# Altium PCB PMP.PcbDoc (part 1 of 2)
Units mil, origin at the board's own origin, x right, y up, seen from the top; angles counter-clockwise.
Board outline 5476.1 x 4612.44 mil, 2 copper layers (Top Layer, Bottom Layer); 198 components, 133 nets, 635 pads, 71 vias.
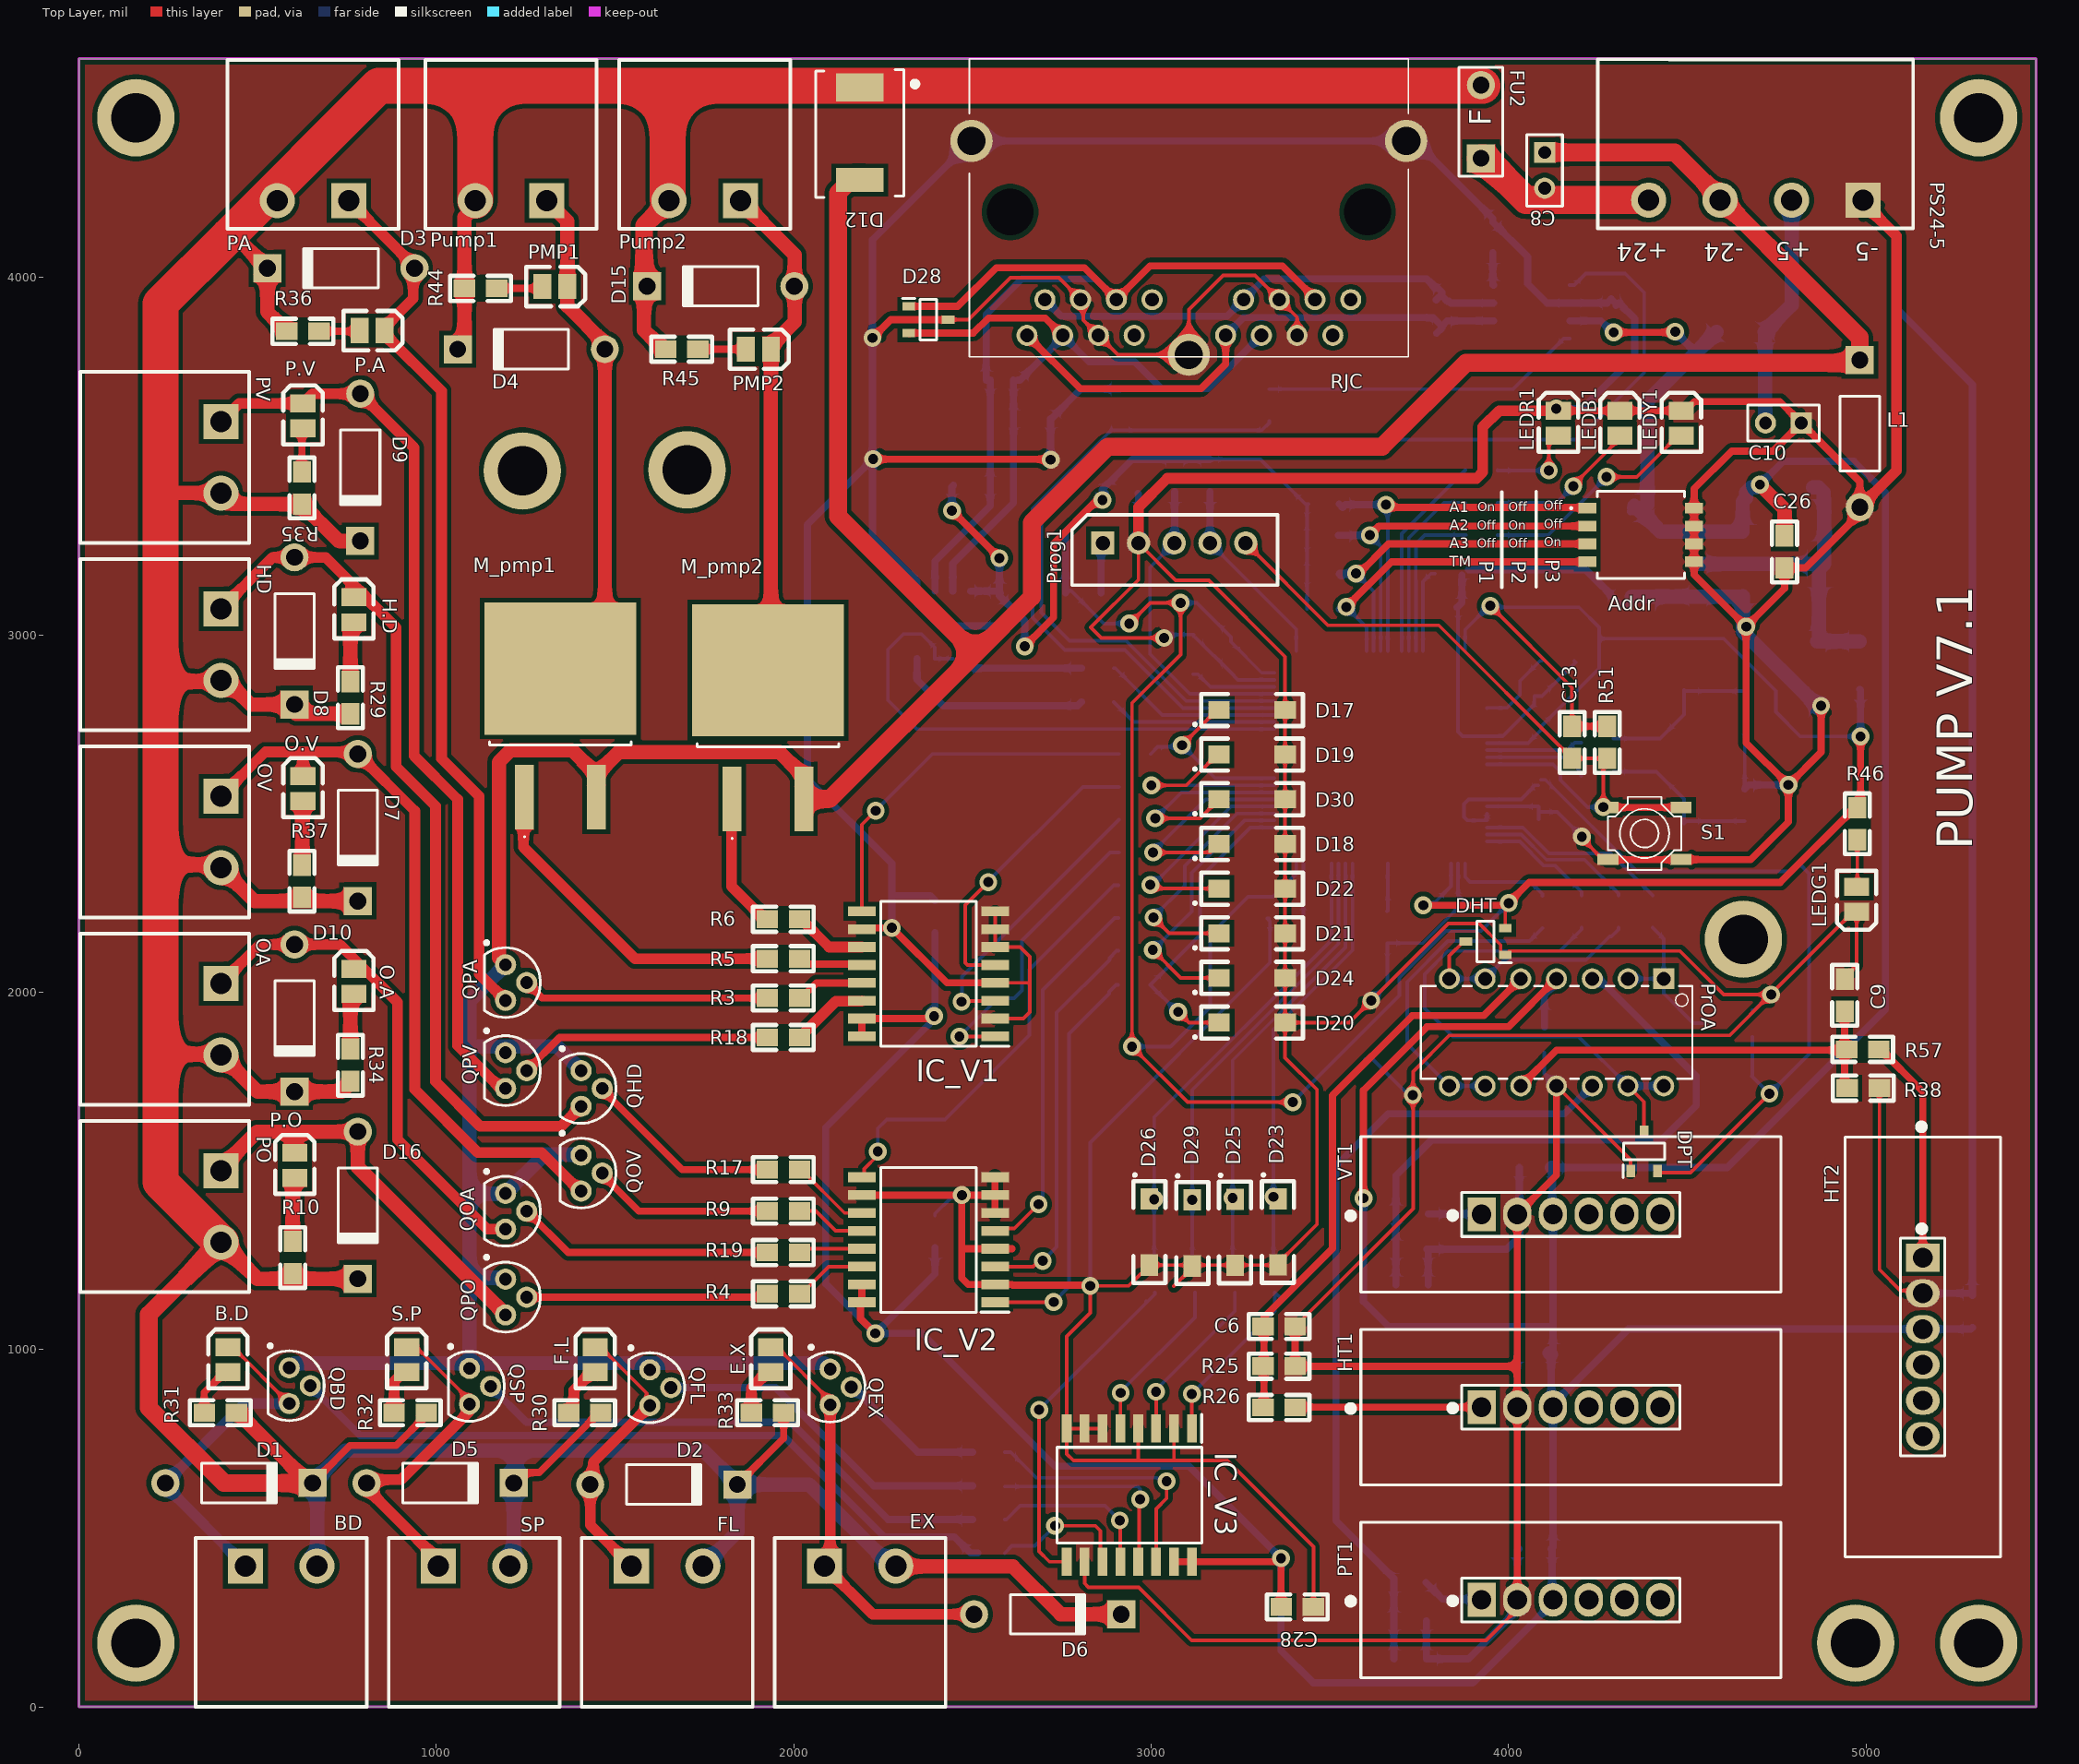
[diagram p0: Top Layer view]
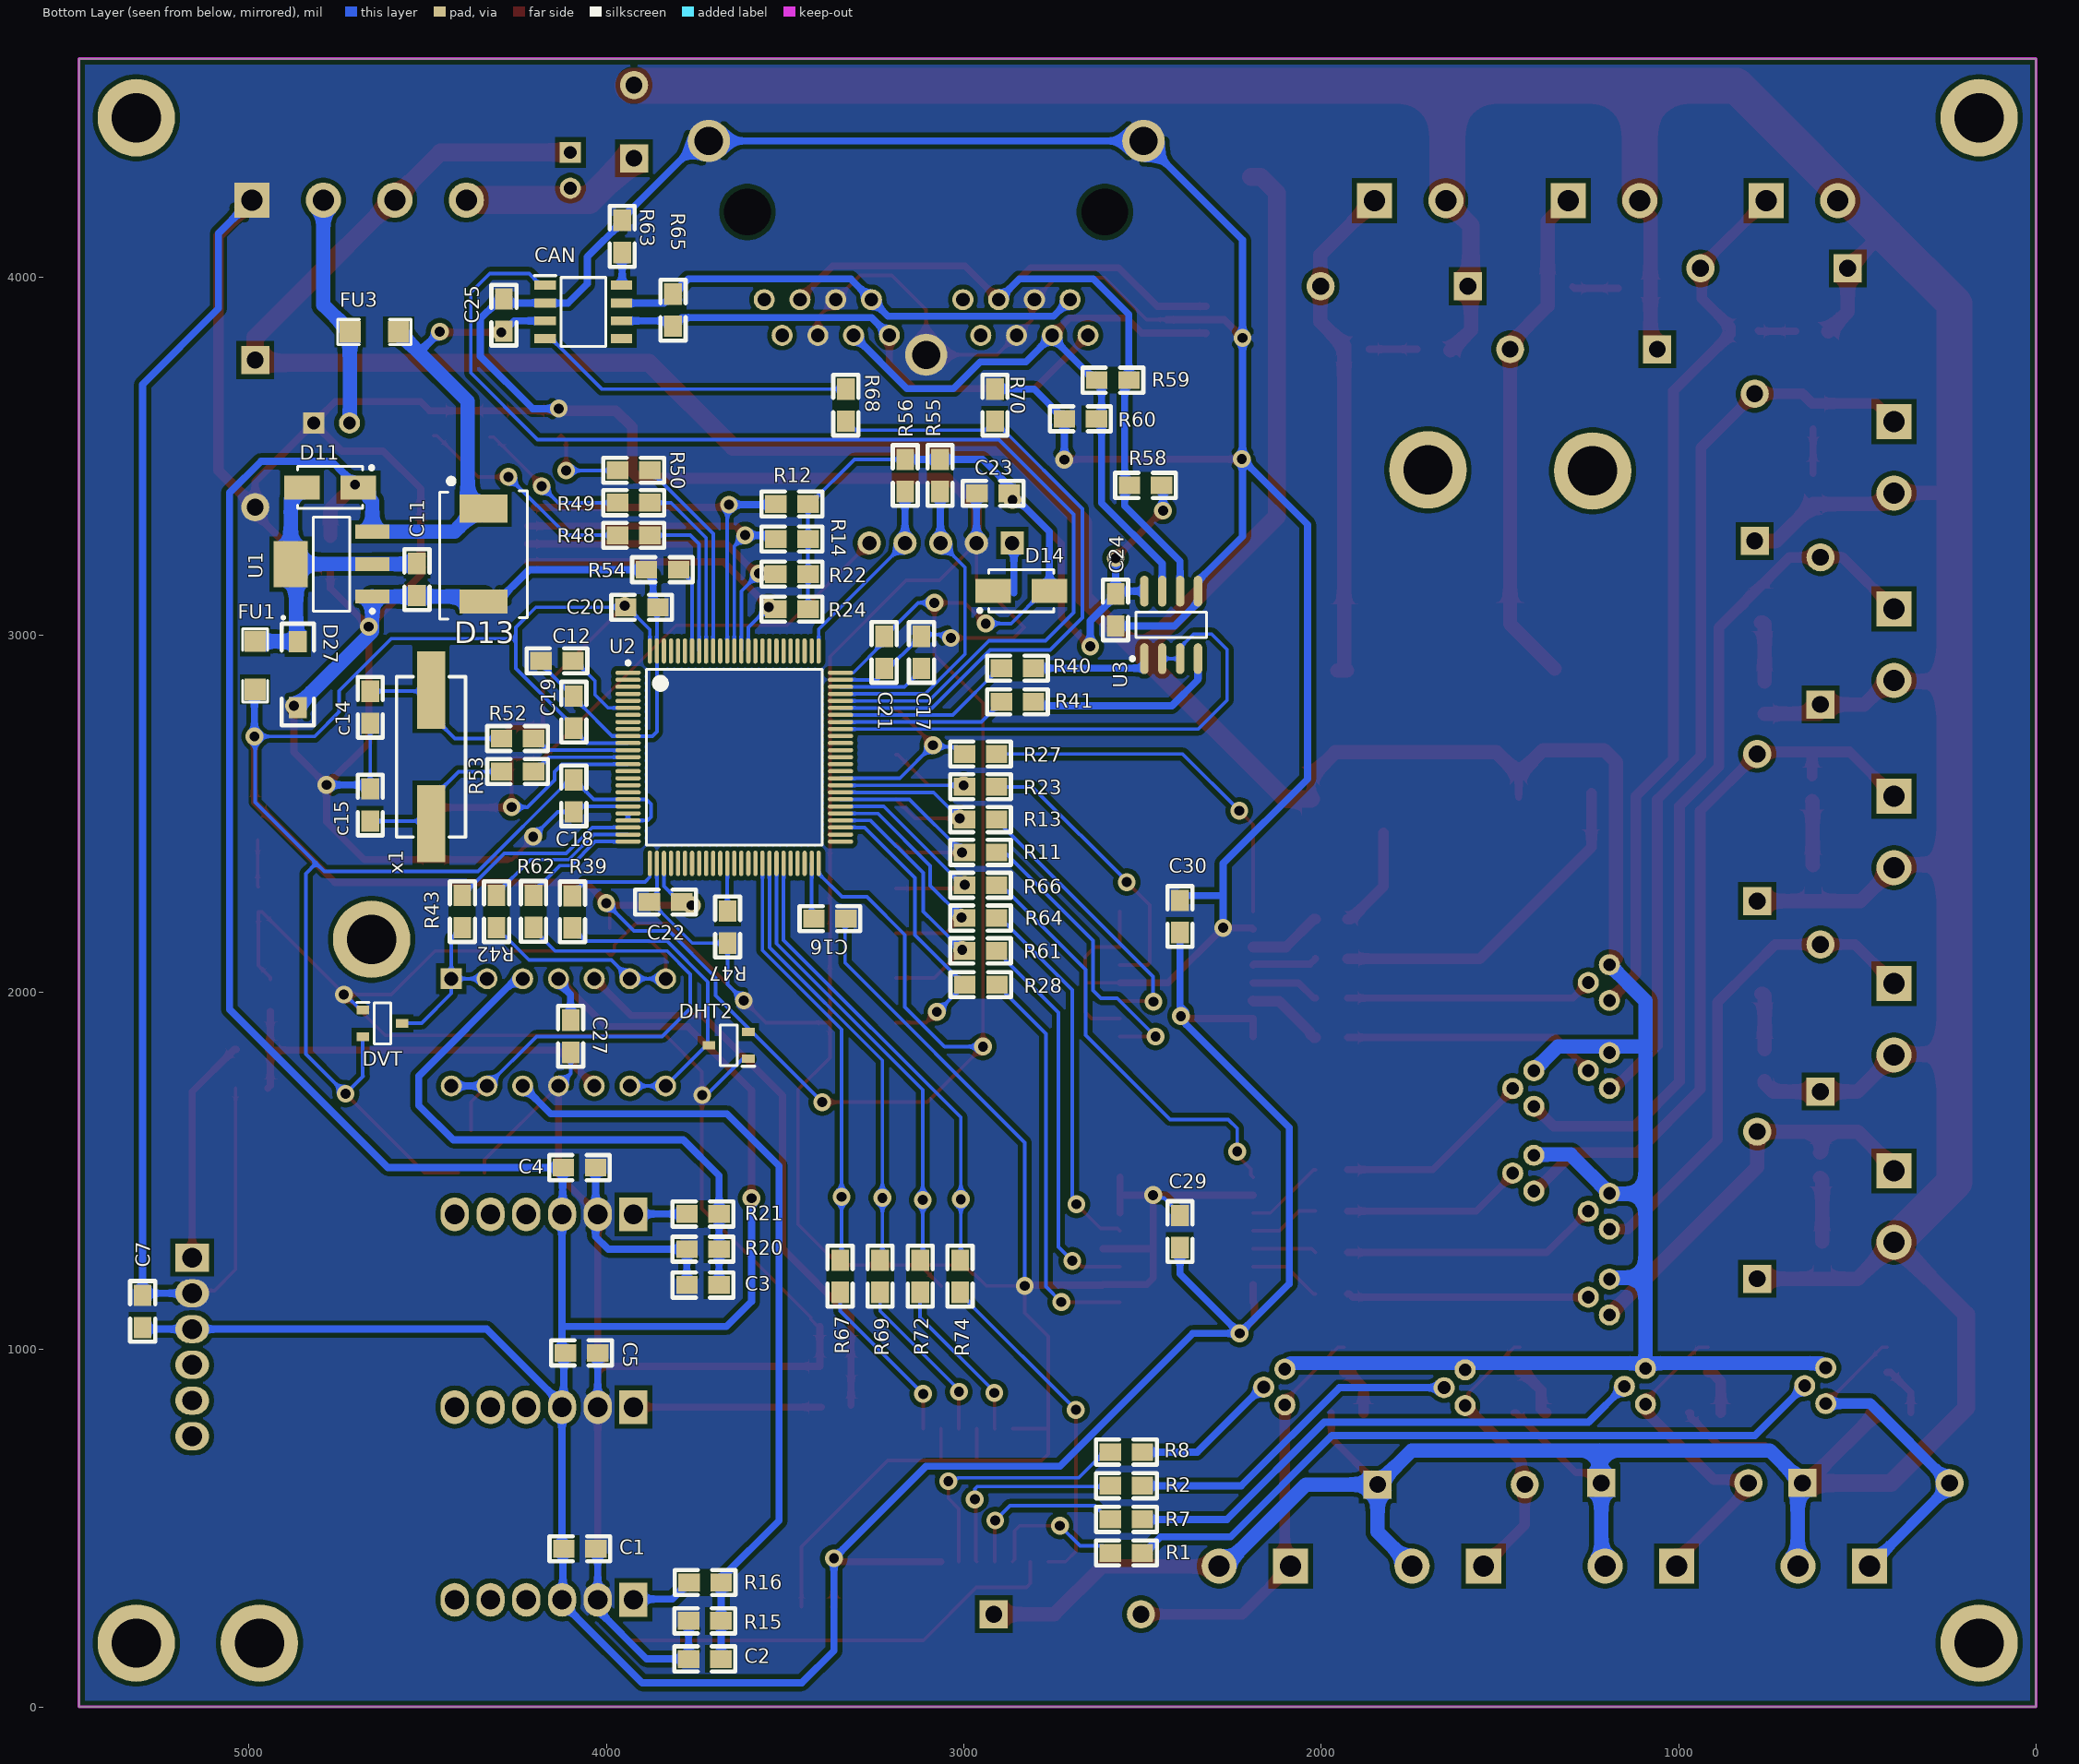
[diagram p1: Bottom Layer view, seen from below]

## Layer stack, top to bottom
Top Solder: solder mask 0.4, Solder Resist, Dk 3.5
Top Layer: signal copper 1.4
Dielectric 1: dielectric 12.6, FR-4, Dk 4.8
Bottom Layer: signal copper 1.4
Bottom Solder: solder mask 0.4, Solder Resist, Dk 3.5

## Board outline
0,0 0,4612.44 5476.1,4612.44 5476.1,0

## Design rules (kind name [scope] priority, off if disabled: settings)
AssemblyTestPointUsage [All] p1 off:
AssemblyTestpoint [All] p1 off: testpointundercomponent=TRUE minsize=40 maxsize=100 preferedsize=60 minholesize=0 maxholesize=40 preferedholesize=32 testpointgrid=1 usegrid=TRUE gridtolerance=0.01 allowsidetop=TRUE allowsidebottom=TRUE
Clearance Clearance_1 [All vs InPolygon] p1: gap=13 ignorepadtopadclearanceinfootprint=FALSE except(0: Arc-Hole Track-Hole SMDPad-Hole THPad-Hole Via-Hole Fill-Hole Poly-Hole Region-Hole Text-Hole)
Clearance [All] p2: gap=7 ignorepadtopadclearanceinfootprint=FALSE except(0: Arc-Hole Track-Hole SMDPad-Hole THPad-Hole Via-Hole Fill-Hole Poly-Hole Region-Hole Text-Hole)
ComponentClearance [All] p1 off: gap=10 collisioncheckmode=3 verticalgap=10 showdistances=FALSE
FabricationTestPointUsage [All] p1 off: valid=0 allowmultiple=FALSE
FabricationTestpoint [All] p1 off: side=3 testpointundercomponent=TRUE minsize=40 maxsize=100 preferedsize=60 minholesize=0 maxholesize=40 preferedholesize=32 testpointgrid=1 allowsidetop=TRUE allowsidebottom=TRUE usegrid=TRUE gridtolerance=0.01
Height [All] p1 off: minheight=0 maxheight=3937.01 prefheight=500
HoleSize [All] p1 off: absolutevalues=TRUE maxlimit=100 minlimit=1 maxpercent=80.000 minpercent=20.000
HoleToHoleClearance [All] p1 off: gap=10 allowstackedmicrovias=TRUE
LayerPairs [All] p1 off: enforce=TRUE
MinimumSolderMaskSliver [All] p1 off: minsoldermaskwidth=10
NetAntennae [All] p1 off: netantennaetolerance=0
PasteMaskExpansion [All] p1 off: expansion=0
PlaneConnect [All] p1: planeconnectstyle=Direct reliefexpansion=20 reliefentries=4 reliefconductorwidth=10 reliefairgap=10
PolygonConnect [All] p1: connectstyle=Direct reliefconductorwidth=10 reliefentries=4 polygonreliefangle="90 Angle" airgapwidth=10
RoutingVias [All] p1: holewidth=15.75 width=31.5 viastyle="Through Hole" minholewidth=11.81 minwidth=23.62 maxholewidth=28 maxwidth=50
SilkToSilkClearance [All] p1 off: silktosilkclearance=10
SilkToSolderMaskClearance [IsPad] p1 off: minsilkscreentomaskgap=10 clearancetoexposedcopper=TRUE
SolderMaskExpansion [All] p1 off: expansion=4 istentingtop=FALSE
Width [All] p1: maxlimit=200 minlimit=10 preferedwidth=10 minimp=50.000000 maximp=50.000000 favimp=50.000000
15 further rules are at their usual default settings.

## Classes and differential pairs
component class "CAN bus": C25 CAN R63 R65 R68 R70 RJC
component class gatedriver: B.D C28 C29 C30 D17 D18 D19 D20 D21 D22 D23 D24 D25 D26 D29 D30 E.X F.L H.D IC_V1 IC_V2 IC_V3 O.A O.V P.A P.O P.V PMP1 PMP2 R10 R11 R13 R23 R27 R28 R29 R30 R31 R32 R33 R34 R35 R36 R37 R44 R45 R61 R64 R66 R67 R69 R72 R74 S.P
component class Power: C8 C10 C11 C26 D11 D12 D13 D27 FU1 FU2 FU3 L1 LEDG1 PS24-5 R46 U1
component class microf4: C12 C13 c14 c15 C16 C17 C18 C19 C20 C21 C22 C23 C24 D14 D28 LEDB1 LEDR1 LEDY1 Prog1 R40 R41 R47 R48 R49 R50 R51 R52 R53 R54 R55 R56 R58 R59 R60 S1 U2 U3 x1
component class accessories: Addr BD C1 C2 C3 C4 C5 C6 C7 C9 C27 D1 D2 D3 D4 D5 D6 D7 D8 D9 D10 D15 D16 DHT DHT2 DPT DVT EX FL HD HT1 HT2 M_pmp1 M_pmp2 OA OV PA PO PrOA PT1 Pump1 Pump2 PV QBD QEX QFL QHD QOA QOV QPA QPO QPV QSP R1 R2 R3 R4 R5 R6 R7 R8 R9 R12 R14 R15 R16 R17 R18 R19 R20 R21 R22 R24 R25 R26 R38 R39 R42 R43 R57 R62 SP VT1

## Components (designator, comment, footprint, x,y, rotation, side; value= is the part's Value field where it differs from the comment)
Addr "GDH04STR04" GDH04STR04 4370,3279.57 r270 top
B.D "Red LED" 3518 417.05,971.26 r90 top
BD "Header 2" PHOENIX2-RIGHT 566.06,393.94 r270 top
C1 "100nF" 0805 4074.53,442.17 r180 bottom
C2 "100nF" 0805 3725.12,134.09 r0 bottom
C3 "100nF" 0805 3730.04,1180.35 r0 bottom
C4 "100nF" 0805 4075.51,1509.09 r180 bottom
C5 "100nF" 0805 4069.61,990.39 r180 bottom
C6 "100nF" 0805 3357.99,1064.21 r0 top
C7 "100nF" 0805 5297.95,1106.54 r90 bottom
C8 "100uf" HDR1X2 4101.1,4350.24 r270 top
C9 "100nF" 0805 4940.67,1991.38 r90 top
C10 "100uf" HDR1X2 4819.21,3592.76 r180 top
C11 "10uF" 0805 4530.24,3154.76 r270 bottom
C12 "100nF" 0805 4138.5,2927.4 r180 bottom
C13 "" 0805 4177.87,2699.06 r270 top value=100nF
c14 "22pf" 0805 4661.14,2797.48 r270 bottom
c15 "22pf" 0805 4661.14,2523.86 r90 bottom
C16 "2.2uF" 0805 3374.72,2205.94 r180 bottom
C17 "2.2uF" 0805 3118.82,2951.02 r90 bottom
C18 "100nF" 0805 4091.26,2549.45 r90 bottom
C19 "100nF" 0805 4091.26,2783.7 r270 bottom
C20 "100nF" 0805 3901.3,3077.01 r0 bottom
C21 "100nF" 0805 3223.15,2951.02 r90 bottom
C22 "100nF" 0805 3834.65,2252.2 r180 bottom
C23 "100nF" 0805 2918.03,3395.91 r180 bottom
C24 "100nF" 0805 2575.51,3069.84 r90 bottom
C25 "100nf" 0805 4287.13,3894.92 r270 bottom value=100nF
C26 "10uF" 0805 4772.36,3232.24 r270 top
C27 "100nF" 0805 4100.12,1876.5 r90 bottom
C28 "100nF" 0805 3409.17,279.76 r180 top
C29 "100nF" 0805 2395.39,1329.96 r270 bottom
C30 "100nF" 0805 2395.39,2211.85 r270 bottom
CAN "MCP2551-E_SN" SOIC127P600X175-8N 4064.68,3903.78 r180 bottom
D1 "Diode 1N4007" DO-41 447.56,626.22 r0 top
D2 "Diode 1N4007" DO-41 1636.34,622.28 r0 top
D3 "Diode 1N4007" DO-41 732.99,4025.83 r180 top
D4 "Diode 1N4007" DO-41 1265.67,3799.45 r180 top
D5 "Diode 1N4007" DO-41 1010.55,626.22 r0 top
D6 "Diode 1N4007" DO-41 2710.35,259.09 r0 top
D7 "Diode 1N4007" DO-41 780.24,2460.87 r270 top
D8 "Diode 1N4007" DO-41 603.07,3011.06 r270 top
D9 "Diode 1N4007" DO-41 787.13,3468.74 r270 top
D10 "Diode 1N4007" DO-41 603.07,1927.6 r270 top
D11 "US1M" US1M 4773.35,3412.64 r180 bottom
D12 "SS34LWHRVG" SS34 2182.8,4400.83 r90 top
D13 "SS34LWHRVG" SS34 4346.18,3221.69 r90 bottom
D14 "US1M" US1M 2839.29,3123.27 r0 bottom
D15 "Diode 1N4007" DO-41 1795.98,3975.63 r180 top
D16 "Diode 1N4007" DO-41 780.24,1403.78 r270 top
D17 "Diode Zener" D1805 3284.17,2792.56 r180 top
D18 "Diode Zener" D1805 3284.17,2417.56 r180 top
D19 "Diode Zener" D1805 3284.17,2667.56 r180 top
D20 "Diode Zener" D1805 3284.17,1917.56 r180 top
D21 "Diode Zener" D1805 3284.17,2167.56 r180 top
D22 "Diode Zener" D1805 3284.17,2292.56 r180 top
D23 "Diode Zener" D1805 3357.72,1327.24 r90 top
D24 "Diode Zener" D1805 3284.17,2042.56 r180 top
D25 "Diode Zener" D1805 3237.73,1326.02 r90 top
D26 "Diode Zener" D1805 2997.76,1327.01 r90 top
D27 "Diode Zener" D1805 4860.94,2887.05 r90 bottom
D28 "PSM712-12" PSM712 2433.78,3883.11 r0 top
D29 "Diode Zener" D1805 3117.74,1324.29 r90 top
D30 "Diode Zener" D1805 3284.17,2542.56 r180 top
DHT "BAT54SWFILMY" psm712 3878.66,2140.98 r180 top
DHT2 "BAT54SWFILMY" psm712 3715.28,1850.63 r0 bottom
DPT "BAT54SWFILMY" psm712 4378.66,1611.46 r90 top
DVT "BAT54SWFILMY" psm712 4569.61,1913.62 r180 bottom
E.X "Red LED" 3518 1935.75,971.26 r90 top
EX "Header 2" PHOENIX2-RIGHT 2185.75,393.94 r270 top
F.L "Red LED" 3518 1444.61,971.26 r90 top
FL "Header 2" PHOENIX2-RIGHT 1645.85,393.94 r270 top
FU1 "Fuse Thermal" 1206 4982.99,2914.61 r270 bottom
FU2 "Fuse Thermal" "RESETABLE FUSE 3A" 3922.95,4332.91 r90 top
FU3 "Fuse Thermal" 1206 4649.33,3847.68 r180 bottom
H.D "Red LED" 3518 769.41,3070.12 r90 top
HD "Header 2" PHOENIX2-RIGHT 397.36,2972.48 r180 top
HT1 "mpx5010dp" MPX-DP 4174.53,838.82 r180 top
HT2 "NF" MPX-DP 5159.17,1007.13 r90 top
IC_V1 "TC4469COE" SOIC127P1034X264-16N 2376.97,2051.18 r180 top
IC_V2 "TC4469COE" SOIC127P1034X264-16N 2376.97,1307.09 r180 top
IC_V3 "TC4469COE" SOIC127P1034X264-16N 2938.98,592.52 r270 top
L1 "ferrit" FBEAD 4982.99,3563.23 r90 top value=10mH
LEDB1 "BLUE LED" 3518 4311.73,3592.32 r90 top
LEDG1 "power" 3518 4974.13,2259.65 r270 top
LEDR1 "Red LED" 3518 4139.49,3592.32 r90 top
LEDY1 "Yellow LED" 3518 4483.98,3592.32 r90 top
M_pmp1 "BTS133" IPB026N06NATMA1 1347.17,2772.87 r270 top
M_pmp2 "BTS133" IPB026N06NATMA1 1927.87,2767.95 r270 top
O.A "Red LED" 3518 769.41,2030.31 r90 top
O.V "Red LED" 3518 626.69,2569.69 r90 top
OA "Header 2" PHOENIX2-RIGHT 397.36,1924.06 r180 top
OV "Header 2" PHOENIX2-RIGHT 397.36,2448.27 r180 top
P.A "Red LED" 3518 820.04,3851.61 r0 top
P.O "Red LED" 3518 604.06,1515.55 r90 top
P.V "Red LED" 3518 626.69,3612.87 r90 top
PA "Header 2" PHOENIX2-RIGHT 654.84,4215.21 r90 top
PMP1 "BLUE LED" 3518 1331.61,3974.65 r0 top
PMP2 "BLUE LED" 3518 1901.3,3799.45 r0 top
PO "Header 2" PHOENIX2-RIGHT 397.36,1399.84 r180 top
PrOA "LM324AN" DIP254P762X432-14 3834.37,1737.64 r270 top
Prog1 "Progrommer" "jp circular 5" 2864.68,3257.13 r0 top
PS24-5 "Header 4" PHOENIX4-RIGHT 4993.05,4215.77 r90 top
PT1 "mpx5100dp" MPX-DP 4174.53,299.45 r180 top
Pump1 "Header 2" PHOENIX2-RIGHT 1208.98,4215.21 r90 top
Pump2 "Header 2" PHOENIX2-RIGHT 1751.3,4215.21 r90 top
PV "Header 2" PHOENIX2-RIGHT 397.36,3496.69 r180 top
QBD "2N2222" 2N2222 588.31,898.66 r180 top
QEX "2N2222" 2N2222 2101.89,894.92 r180 top
QFL "2N2222" 2N2222 1597.36,893.15 r180 top
QHD "2N2222" 2N2222 1405.24,1730.55 r180 top
QOA "2N2222" 2N2222 1193.62,1386.99 r180 top
QOV "2N2222" 2N2222 1405.24,1493.6 r180 top
QPA "2N2222" 2N2222 1193.62,2026.81 r180 top
QPO "2N2222" 2N2222 1193.62,1146.69 r180 top
QPV "2N2222" 2N2222 1193.62,1780.55 r180 top
QSP "2N2222" 2N2222 1092.83,896.89 r180 top
R1 "1k" 0805 2545.28,430.35 r180 bottom
R2 "1k" 0805 2545.28,618.67 r180 bottom
R3 "1k" 0805 1971.18,1983.5 r180 top
R4 "1k" 0805 1971.18,1155.75 r180 top
R5 "100" 0805 1971.18,2093.74 r180 top
R6 "100" 0805 1971.18,2203.98 r180 top
R7 "1k" 0805 2545.28,524.51 r180 bottom
R8 "1k" 0805 2545.28,712.83 r180 bottom
R9 "1k" 0805 1971.18,1387.42 r180 top
R10 "4.7k" 0805 598.15,1257.4 r90 top
R11 "220" 0805 2953.46,2391.12 r180 bottom
R12 "10k" 0805 3481.02,3366.38 r180 bottom
R13 "220" 0805 2953.46,2482.94 r0 bottom
R14 "10k" 0805 3481.02,3268.28 r180 bottom
R15 "3.3k" 0805 3725.12,240.39 r180 bottom
R16 "1.8k" 0805 3724.13,347.68 r0 bottom
R17 "1k" 0805 1971.18,1503.26 r180 top
R18 "1k" 0805 1971.18,1873.27 r180 top
R19 "1k" 0805 1971.18,1271.58 r180 top
R20 "3.3k" 0805 3730.04,1280.75 r180 bottom
R21 "1.8k" 0805 3730.04,1379.17 r0 bottom
R22 "10k" 0805 3481.02,3170.18 r180 bottom
R23 "220" 0805 2953.46,2574.76 r0 bottom
R24 "10k" 0805 3481.02,3072.09 r180 bottom
R25 "3.3k" 0805 3357.99,952.99 r180 top
R26 "1.8k" 0805 3357.99,837.83 r0 top
R27 "220" 0805 2953.46,2666.57 r0 bottom
R28 "220" 0805 2952.48,2020.91 r180 bottom
R29 "4.7k" 0805 759.57,2824.06 r90 top
R30 "4.7k" 0805 1415.08,823.07 r180 top
R31 "4.7k" 0805 395.67,823.07 r180 top
R32 "4.7k" 0805 926.89,823.07 r180 top
R33 "4.7k" 0805 1926.61,823.07 r180 top
R34 "4.7k" 0805 759.57,1795.79 r90 top
R35 "4.7k" 0805 623.74,3410.94 r90 top
R36 "4.7k" 0805 626.69,3849.65 r0 top
R37 "4.7k" 0805 623.74,2310.55 r90 top
R38 "3.3k" 0805 4992.83,1731.54 r180 top
R39 "0" 0805 4095.2,2224.65 r90 bottom
R40 "10" 0805 2850.12,2906.73 r0 bottom
R41 "10" 0805 2850.12,2812.24 r0 bottom
R42 "0" 0805 4307.8,2225.63 r90 bottom
R43 "0" 0805 4403.27,2225.63 r270 bottom
R44 "4.7k" 0805 1123.66,3969.72 r0 top
R45 "4.7k" 0805 1686.73,3799.45 r0 top
R46 "330" 0805 4976.1,2471.42 r270 top
R47 "Res1" 0805 3661.14,2182.32 r270 bottom value=10k
R48 "220" 0805 3923.94,3278.78 r0 bottom
R49 "220" 0805 3923.94,3369.82 r0 bottom
R50 "220" 0805 3923.94,3460.87 r0 bottom
R51 "10k" 0805 4276.3,2699.06 r90 top
R52 "0" 0805 4248.74,2709.88 r0 bottom
R53 "220" 0805 4248.74,2617.36 r180 bottom
R54 "10k" 0805 3843.23,3182.32 r0 bottom
R55 "10k" 0805 3066.65,3446.1 r90 bottom
R56 "10k" 0805 3164.09,3446.1 r90 bottom
R57 "1.8k" 0805 4991.14,1839.8 r0 top
R58 "4.7K" 0805 2491.85,3418.54 r0 bottom
R59 "NF" 0805 2583.11,3712.83 r0 bottom
R60 "4.7K" 0805 2673.94,3604.57 r0 bottom
R61 "220" 0805 2953.46,2115.67 r0 bottom
R62 "0" 0805 4204.45,2225.91 r90 bottom
R63 "" 0805 3956.42,4115.12 r270 bottom value=10k
R64 "220" 0805 2953.46,2207.49 r0 bottom
R65 "" 0805 3813.7,3908.7 r270 bottom value=120
R66 "220" 0805 2953.46,2299.31 r0 bottom
R67 "220" 0805 3346.18,1204.96 r270 bottom
R68 "" 0805 3330.43,3642.95 r270 bottom value=1.8k
R69 "220" 0805 3234.3,1204.96 r90 bottom
R70 "" 0805 2913.11,3642.95 r90 bottom value=3.3k
R72 "220" 0805 3122.43,1204.96 r90 bottom
R74 "220" 0805 3010.55,1204.96 r90 bottom
RJC "RJ45-2x" RJ45_DUAL_RIGHT 3105.63,3783.9 r270 top
S1 "SW-PB" SW-PB-4P 4278.27,2516.97 r0 top
S.P "Red LED" 3518 917.05,971.26 r90 top
SP "Header 2" PHOENIX2-RIGHT 1105.96,393.94 r270 top
U1 "REG1117-3.3" SOT223 4769.41,3198.07 r0 bottom
U2 "STM32F40X_41X-SQ100" 100A_N 3642.44,2657.72 r180 bottom
U3 "MAX485CSA" NSO8_N 2420,3027.8 r90 bottom
VT1 "mpx5010dp" MPX-DP 4174.53,1378.19 r180 top
x1 "8MHz" HC49/4HSMX_1 4490.87,2658.7 r90 bottom

## Footprints (in the part's own frame and the unit in brackets; to place one, negate y for a bottom-side part, rotate by r counter-clockwise, add the part's x,y. Pads: shape width x height; smd on the part's side, far side on the other; paste and mask are expansions set on the pad)
2N2222 [mm] "TO, Flat Index; 3 In-Line, Axial Leads; Body Dia. 4.5mm; Leads 0.51 x 0.48 mm (max)"
  round 1.5 hole 0.9: 1(0,-1.27) 2(-1.5,0) 3(0,1.27)
  silkscreen extent -2.48,-2.95 1.5,2.48, body extent -2.48,-2.5 1.5,2.5, height 6.86
100A_N [mm] "Thin QFP, 100-Leads, Body 14x14mm, Pitch 0.5mm, IPC Medium Density"
  oval 1.8x0.3 smd: 1(-7.55,6) 2(-7.55,5.5) 3(-7.55,5) 4(-7.55,4.5) 5(-7.55,4) 6(-7.55,3.5) 7(-7.55,3) 8(-7.55,2.5) 9(-7.55,2) 10(-7.55,1.5) 11(-7.55,1) 12(-7.55,0.5) 13(-7.55,0) 14(-7.55,-0.5) 15(-7.55,-1) 16(-7.55,-1.5) 17(-7.55,-2) 18(-7.55,-2.5) 19(-7.55,-3) 20(-7.55,-3.5) 21(-7.55,-4) 22(-7.55,-4.5) 23(-7.55,-5) 24(-7.55,-5.5) 25(-7.55,-6) 51(7.55,-6) 52(7.55,-5.5) 53(7.55,-5) 54(7.55,-4.5) 55(7.55,-4) 56(7.55,-3.5) 57(7.55,-3) 58(7.55,-2.5) 59(7.55,-2) 60(7.55,-1.5) 61(7.55,-1) 62(7.55,-0.5) 63(7.55,0) 64(7.55,0.5) 65(7.55,1) 66(7.55,1.5) 67(7.55,2) 68(7.55,2.5) 69(7.55,3) 70(7.55,3.5) 71(7.55,4) 72(7.55,4.5) 73(7.55,5) 74(7.55,5.5) 75(7.55,6)
  oval 0.3x1.8 smd: 26(-6,-7.55) 27(-5.5,-7.55) 28(-5,-7.55) 29(-4.5,-7.55) 30(-4,-7.55) 31(-3.5,-7.55) 32(-3,-7.55) 33(-2.5,-7.55) 34(-2,-7.55) 35(-1.5,-7.55) 36(-1,-7.55) 37(-0.5,-7.55) 38(0,-7.55) 39(0.5,-7.55) 40(1,-7.55) 41(1.5,-7.55) 42(2,-7.55) 43(2.5,-7.55) 44(3,-7.55) 45(3.5,-7.55) 46(4,-7.55) 47(4.5,-7.55) 48(5,-7.55) 49(5.5,-7.55) 50(6,-7.55) 76(6,7.55) 77(5.5,7.55) 78(5,7.55) 79(4.5,7.55) 80(4,7.55) 81(3.5,7.55) 82(3,7.55) 83(2.5,7.55) 84(2,7.55) 85(1.5,7.55) 86(1,7.55) 87(0.5,7.55) 88(0,7.55) 89(-0.5,7.55) 90(-1,7.55) 91(-1.5,7.55) 92(-2,7.55) 93(-2.5,7.55) 94(-3,7.55) 95(-3.5,7.55) 96(-4,7.55) 97(-4.5,7.55) 98(-5,7.55) 99(-5.5,7.55) 100(-6,7.55)
  silkscreen extent -7.68,-6.25 6.25,6.82, body extent -7,-7 7,7, height 1.2
0805 [mil]
  rect 60x50 smd: 1(-45,0) 2(45,0)
  silkscreen extent -85,-35 85,35
1206 [mil]
  rect 60x60 smd: 1(-67.5,0) 2(67.5,0)
  silkscreen extent -102,-35 102,35
3518 [mil]
  rect 50x70 smd: 1(35,0) 2(-35,0)
  silkscreen extent -80,-55 85,55
D1805 [mil]
  rect 60x50 smd: 1(-90.75,2.68) 2(94.25,2.68)
  silkscreen extent -141,-42 165,48
DIP254P762X432-14 [mil]
  rect 58.5x58.5 hole 39: 1(-300,600)
  round 58.5 hole 39: 2(-300,500) 3(-300,400) 4(-300,300) 5(-300,200) 6(-300,100) 7(-300,0) 8(0,0) 9(0,100) 10(0,200) 11(0,300) 12(0,400) 13(0,500) 14(0,600)
  silkscreen extent -280,-80 -20,680
DO-41 [mm] "Diode, Axial; Body 5.2 x 2.7 mm (LxDia. max), Lead Dia. 0.86 mm (max)"
  round 2 hole 1.2: 1(-5.23,0)
  rect 2x2 hole 1.2: 2(5.23,0)
  silkscreen extent -2.65,-1.4 2.75,1.4
FBEAD [mm] "Diode, Axial; Body 5.2 x 2.7 mm (LxDia. max), Lead Dia. 0.86 mm (max)"
  round 2 hole 1.2: 1(-5.23,0)
  rect 2x2 hole 1.2: 2(5.23,0)
  silkscreen extent -2.65,-1.4 2.65,1.4
GDH04STR04 [mm]
  rect 0.76x1.27 smd: 1(-1.905,-3.795) 2(-0.635,-3.795) 3(0.635,-3.795) 4(1.905,-3.795) 5(1.905,3.795) 6(0.635,3.795) 7(-0.635,3.795) 8(-1.905,3.795)
  silkscreen extent -3.1,-5 3.1,3.1
HC49/4HSMX_1 [mm]
  rect 5.5x2 smd: 1(-4.75,0) 2(4.75,0)
  silkscreen extent -5.7,-2.45 5.7,2.45
HDR1X2 [mm] "Connector; Header; 2 Position"
  rect 1.5x1.5 hole 0.9: 1(0,0)
  round 1.5 hole 0.9: 2(2.54,0)
  silkscreen extent -1.27,-1.27 3.81,1.27
IPB026N06NATMA1 [mm]
  rect 4.6x1.35 smd: 1(5.775,-2.55) 3(5.775,2.55)
  rect 9.4x10.8 smd: 2(-3.375,0)
  silkscreen extent 1.83,-5.03 8.62,5.03
"jp circular 5" [mil]
  rect 65x65 hole 40: 1(0,0)
  round 65 hole 40: 2(100,0) 3(200,0) 4(300,0) 5(400,0)
  silkscreen extent -86,-118 490,79
MPX-DP [mm]
  rect 2x2.4 hole 1.4: 1(6.35,0)
  oval 2x2.4 hole 1.4: 2(3.81,0) 3(1.27,0) 4(-1.27,0) 5(-3.81,0) 6(-6.35,0)
  silkscreen extent -14.92,-5.53 15.85,5.53
NSO8_N [mm] "SOIC, 8-Leads, Body 4.9x3.9mm, Pitch 1.27mm, IPC Medium Density"
  oval 2.2x0.6 smd: 1(-2.4,1.905) 2(-2.4,0.635) 3(-2.4,-0.635) 4(-2.4,-1.905) 5(2.4,-1.905) 6(2.4,-0.635) 7(2.4,0.635) 8(2.4,1.905)
  silkscreen extent -2.52,-2.5 0.9,2.88, body extent -2,-2.5 2,2.5, height 1.75
PHOENIX2-RIGHT [mm]
  rect 2.5x2.5 hole 1.5: 1(0,-2.54)
  round 2.5 hole 1.5: 2(0,2.54)
  silkscreen extent -2,-6.08 10.01,6.08, body extent -1.98,-6.07 10.01,6.1, height 8.6
PHOENIX4-RIGHT [mm]
  rect 2.5x2.5 hole 1.5: 1(0.025,0.02)
  round 2.5 hole 1.5: 2(0.025,5.1) 3(0.025,10.18) 4(0.025,15.26)
  silkscreen extent -1.97,-3.54 10.03,18.87, body extent -1.96,-3.5 10.03,18.85, height 8.6
PSM712 [mm]
  rect 0.9x0.6 smd: 1(-2.85,0.925) 2(-2.85,-0.975) 3(-0.05,-0.025)
  silkscreen extent -3.3,-1.48 -0.85,1.47, body extent -2.85,-1.47 -0.05,1.43, height 1.3
psm712 [mm]
  rect 0.9x0.6 smd: 1(-2.85,0.925) 2(-2.85,-0.975) 3(-0.05,-0.025)
  silkscreen extent -3.3,-1.48 -0.85,1.47, body extent -2.85,-1.47 -0.05,1.43, height 1.3
"RESETABLE FUSE 3A" [mm]
  rect 2x2 hole 1.2: 1(0.02,0)
  round 2 hole 1.2: 2(5.225,0)
  silkscreen extent -1.25,-1.54 6.5,1.58
RJ45_DUAL_RIGHT [mm]
  round 1.493 hole 0.96: 1(-3.92,11.505) 2(-1.38,10.235) 3(-3.92,8.965) 4(-1.38,7.695) 5(-3.92,6.425) 6(-1.38,5.155) 7(-3.92,3.885) 8(-1.38,2.615) 9(-3.92,-2.615) 10(-1.38,-3.885) 11(-3.92,-5.155) 12(-1.38,-6.425) 13(-3.92,-7.695) 14(-1.38,-8.965) 15(-3.92,-10.235) 16(-1.38,-11.505)
  round 1.665 hole 3.33 unplated: P(-10.15,12.7) P(-10.15,-12.7)
  round 3.015 hole 2.01: SH(-15.2,15.45) SH(-15.2,-15.45)
  round 3 hole 2: SH(0,0)
  silkscreen extent -21.05,-15.6 0.15,15.6, body extent -21.05,-15.6 0.15,15.6, height 13.8
SOIC127P600X175-8N [mm]
  rect 1.525x0.65 smd: 1(-2.712,1.905) 2(-2.712,0.635) 3(-2.712,-0.635) 4(-2.712,-1.905) 5(2.712,-1.905) 6(2.712,-0.635) 7(2.712,0.635) 8(2.712,1.905)
  silkscreen extent -3.47,-2.45 1.6,2.58, body extent -3,-2.45 3,2.45, height 1.75
SOIC127P1034X264-16N [mm]
  rect 1.98x0.7 smd: 1(-4.735,4.445) 2(-4.735,3.175) 3(-4.735,1.905) 4(-4.735,0.635) 5(-4.735,-0.635) 6(-4.735,-1.905) 7(-4.735,-3.175) 8(-4.735,-4.445) 9(4.735,-4.445) 10(4.735,-3.175) 11(4.735,-1.905) 12(4.735,-0.635) 13(4.735,0.635) 14(4.735,1.905) 15(4.735,3.175) 16(4.735,4.445)
  silkscreen extent -5.72,-5.15 3.4,5.15, body extent -5.17,-5.15 5.17,5.15, height 2.64
SOT223 [mm] "SOT223, 4-Leads, Body 6.7x7.3mm (max), Pitch 2.30mm, IPC Medium Density"
  rect 2.4x1 smd: 1(-2.9,2.3) 2(-2.9,0) 3(-2.9,-2.3)
  rect 2.4x3.3 smd: 4(2.9,0)
  silkscreen extent -3.02,-3.35 1.3,3.47, body extent -1.85,-3.35 1.85,3.35, height 1.8
SS34 [mm] "Molded Diode, 2-Leads, Body 4.3x2.6mm, IPC Medium Density"
  rect 2x3.4 smd: 1(3.35,-0.05)
  rect 1.7x3.4 smd: 2(-3.25,-0.05)
  silkscreen extent -4.5,-4.1 4.6,3.08
SW-PB-4P [mm]
  rect 1.5x0.8 smd: 1(0,0) 1(5.2,0) 2(0,-3.7) 2(5.2,-3.7)
  silkscreen extent 0,-4.45 5.2,0.75, body extent 0,-4.45 5.22,0.75, height 2.2
US1M [mm] "Molded Diode, 2-Leads, Body 4.3x2.6mm, IPC Medium Density"
  rect 2.5x1.7 smd: 1(-2,0) 2(2,0)
  silkscreen extent -2.3,-1.5 3.07,1.52, body extent -2.3,-1.46 2.3,1.46, height 2.3

## Part data
Addr: "Switch", Manufacturer_Name="TE Connectivity", Mouser Part Number=506-GDH04STR04, Arrow Part Number=GDH04STR04, Arrow Price/Stock=https://www.arrow.com/en/products/gdh04str04/te-connectivity?region=nac, Datasheet Link=https://www.te.com/commerce/DocumentDelivery/DDEController?Action=showdoc&DocId=Customer+Drawing%7F1571983%7FC6%7Fpdf%7FEnglish%7FENG_CD_1571983_C6.pdf%7F1571983-5, Height=2.31mm, Manufacturer_Part_Number=GDH04STR04, Mouser Price/Stock=https://www.mouser.co.uk/ProductDetail/TE-Connectivity-Alcoswitch/GDH04STR04?qs=k5V78Jg%2Feq61xymfueD9KA%3D%3D
B.D E.X F.L H.D LEDB1 LEDG1 LEDR1 LEDY1 O.A O.V P.A P.O P.V S.P: library part LED3, "Typical BLUE SiC LED", PackageDocument=16-Apr-2002, DatasheetDocument=16-Apr-2002, LatestRevisionDate=17-Dec-2003, LatestRevisionNote="PCB Footprint replaced.", PackageReference=3.5X2.8X1.9, Published=8-Jun-2000, Publisher="Altium Limited"
BD EX FL HD OA OV PA PO Pump1 Pump2 PV SP: "Header, 2-Pin", LatestRevisionDate=17-Jul-2002, LatestRevisionNote="Re-released for DXP Platform.", Publisher="Altium Limited"
C1 C2 C3 C4 C5 C6 C7 C8 C9 C10 C12 C24 C25: library part Cap, "Capacitor", LatestRevisionDate=17-Jul-2002, LatestRevisionNote="Re-released for DXP Platform.", PackageReference=RAD-0.3, Published=8-Jun-2000, Publisher="Altium Limited"
  C1 C2 C3 C4 C5 C6 C7 C8 C9 C10: PackageDescription="Radial Cap, Thru-Hole; 2 Leads; 0.3 in Pin Spacing"
C11 C26: library part Cap_El, "Capacitor", PackageReference=CAPR5-4X5, Published=23-Sep-2002, Publisher="Altium Limited"
C13 C18 C19 C20 C21 C22 C23 C27 C28 C29 C30: library part Cap, "Capacitor", Manufacturer="Generic Components", Class=Passive, Published=08/06/2000, Publisher="Altium Hobart Technology Centre", SubClass=Capacitor
c14 c15 C16 C17: library part Cap_UP, "Capacitor", LatestRevisionDate=17-Jul-2002, LatestRevisionNote="Re-released for DXP Platform.", PackageReference=RAD-0.3, Published=8-Jun-2000, Publisher="Altium Limited"
CAN: "Integrated Circuit", Arrow Part Number=MCP2551-E/SN, Manufacturer_Name=Microchip, Mouser Part Number=579-MCP2551-E/SN, Arrow Price/Stock=https://www.arrow.com/en/products/mcp2551-esn/microchip-technology, Datasheet Link=https://datasheet.datasheetarchive.com/originals/distributors/SFDatasheet-4/sf-00090061.pdf, Height=1.75mm, Manufacturer_Part_Number=MCP2551-E/SN, Mouser Price/Stock=https://www.mouser.co.uk/ProductDetail/Microchip-Technology/MCP2551-E-SN?qs=Vn0zuzr35GHkGDCgnw0F9A%3D%3D
D1 D2 D3 D4 D5 D6 D7 D8 D9 D10 D15 D16: "1 Amp General Purpose Rectifier", Code_JEDEC=DO-204-AL, ComponentLink1Description="Manufacturer Link", ComponentLink1URL=http://www.fairchildsemi.com/, ComponentLink2Description=Datasheet, ComponentLink2URL=http://www.fairchildsemi.com/ds/1N%2F1N4001.pdf, DatasheetVersion=1998, LatestRevisionDate=17-Jul-2002, LatestRevisionNote="Re-released for DXP Platform.", PackageDescription="Diode, Axial; Body 5.2 x 2.7 mm (LxDia. max), Lead Dia. 0.86 mm (max)", PackageReference=DO-41, PackageVersion=Aug-1999, Published=8-Jun-2000, Publisher="Altium Limited"
D11 D14: library part Diode, "1 Amp General Purpose Rectifier", Package Information="Latest Revision: Aug-1999", Package Reference=DO-41, Code - JEDEC=DO-204-AL, Datasheet="Latest Revision: 1998", Published=8-Jun-2000, Publisher="Altium Limited", Revision 1="11-Jul-2000: SIM Model Added.", Revision 2="17-Jul-2002: Re-released for DXP Platform."
D12 D13: "Diode", Manufacturer_Name="Taiwan Semiconductor", Mouser Part Number=821-SS34LWHRVG, Arrow Part Number=SS34LWHRVG, Arrow Price/Stock=https://www.arrow.com/en/products/ss34lwhrvg/taiwan-semiconductor?region=asia, Datasheet Link=https://datasheet.datasheetarchive.com/originals/distributors/DKDS-20/389381.pdf, Height=1.02mm, Manufacturer_Part_Number=SS34LWHRVG, Mouser Price/Stock=https://www.mouser.co.uk/ProductDetail/Taiwan-Semiconductor/SS34LWHRVG?qs=5aG0NVq1C4zYvYQjFNyRbA%3D%3D
D17 D18 D19 D20 D21 D22 D23 D24 D25 D26 D27 D29 D30: library part "Diode 1N914", "High Conductance Fast Diode", Code_JEDEC=DO-204-AH, ComponentLink1Description="Manufacturer Link", ComponentLink1URL=http://www.fairchildsemi.com/, ComponentLink2Description=Datasheet, ComponentLink2URL=http://www.fairchildsemi.com/ds/1N%2F1N4448.pdf, DatasheetVersion=1997, LatestRevisionDate=17-Jul-2002, LatestRevisionNote="Re-released for DXP Platform.", PackageDescription="Diode, Axial; Body 3.8 x 1.9 mm (LxDia. max), Lead Dia. 0.53 mm (max)", PackageReference=DO-35, Published=8-Jun-2000, Publisher="Altium Limited"
D28: "TVS Diode (Bi-directional)", Manufacturer_Name="ProTek Devices", Datasheet Link=http://www.protekdevices.com/xyz/documents/datasheets/psm712.pdf, Height=1.21mm, Manufacturer_Part_Number=PSM712-12
DHT DHT2 DPT DVT: "Schottky Diode", Manufacturer_Name=STMicroelectronics, Mouser Part Number=511-BAT54SWFILMY, Arrow Part Number=BAT54SWFILMY, Arrow Price/Stock=https://www.arrow.com/en/products/bat54swfilmy/stmicroelectronics?region=europe, Datasheet Link=https://www.st.com/resource/en/datasheet/cd00001322.pdf, Height=1.1mm, Manufacturer_Part_Number=BAT54SWFILMY, Mouser Price/Stock=https://www.mouser.co.uk/ProductDetail/STMicroelectronics/BAT54SWFILMY?qs=j%252B1pi9TdxUbxN4fraErVag%3D%3D
FU1 FU2 FU3: "Thermal Fuse", LatestRevisionDate=17-Jul-2002, LatestRevisionNote="Re-released for DXP Platform.", PackageDescription="Thru-Hole; 2 Leads", PackageReference=PIN-W2/E2.8, Published=24-Mar-1999, Publisher="Altium Limited"
HT1 HT2 PT1 VT1: library part "Header 6", "Header, 6-Pin", LatestRevisionDate=17-Jul-2002, LatestRevisionNote="Re-released for DXP Platform.", Publisher="Altium Limited"
IC_V1 IC_V2 IC_V3: "Integrated Circuit", Manufacturer_Name=Microchip, Mouser Part Number=579-TC4469COE, Arrow Part Number=TC4469COE, Arrow Price/Stock=https://www.arrow.com/en/products/tc4469coe/microchip-technology?region=nac, Datasheet Link=http://ww1.microchip.com/downloads/en/DeviceDoc/21425C.pdf, Height=2.64mm, Manufacturer_Part_Number=TC4469COE, Mouser Price/Stock=https://www.mouser.co.uk/ProductDetail/Microchip-Technology/TC4469COE?qs=InakTnyiSK%2Fh2FRrgfNERA%3D%3D
L1: library part "Inductor Adj", "Adjustable Inductor", LatestRevisionDate=17-Jul-2002, LatestRevisionNote="Re-released for DXP Platform.", PackageDescription="Axial Device, Thru-Hole; 2 Leads; 0.8 in Pin Spacing", PackageReference=AXIAL-0.8, Published=24-Mar-1999, Publisher="Altium Limited", Set Position=0.5
M_pmp1 M_pmp2: library part IPB026N06NATMA1, "MOSFET (N-Channel)", Manufacturer_Name=Infineon, Mouser Part Number=726-IPB026N06NATMA1, Arrow Part Number=IPB026N06NATMA1, Arrow Price/Stock=https://www.arrow.com/en/products/ipb026n06natma1/infineon-technologies-ag, Datasheet Link=https://www.infineon.com/dgdl/IPB026N06N_Rev2.0.pdf?folderId=db3a304313b8b5a60113cee8763b02d7&fileId=db3a3043372d5cc8013754c7b2a74f7c, Height=4.82mm, Manufacturer_Part_Number=IPB026N06NATMA1, Mouser Price/Stock=https://www.mouser.co.uk/ProductDetail/Infineon-Technologies/IPB026N06NATMA1?qs=4MqXaUMeF56mbQMXMhITXA%3D%3D
PMP1 PMP2: library part LED3, PackageDocument=16-Apr-2002, DatasheetDocument=16-Apr-2002, LatestRevisionDate=17-Dec-2003, LatestRevisionNote="PCB Footprint replaced.", PackageReference=3.5X2.8X1.9, Published=8-Jun-2000, Publisher="Altium Limited"
PrOA: "Integrated Circuit", Manufacturer_Name="Texas Instruments", Mouser Part Number=595-LM324AN, RS Part Number=0527732, Datasheet Link=http://www.ti.com/lit/ds/symlink/lm324a.pdf, Height=5.08mm, Manufacturer_Part_Number=LM324AN, Mouser Price/Stock=https://www.mouser.com/Search/Refine.aspx?Keyword=595-LM324AN, RS Price/Stock=http://uk.rs-online.com/web/p/products/0527732
Prog1: library part "Header 5", "Header, 5-Pin", LatestRevisionDate=17-Jul-2002, LatestRevisionNote="Re-released for DXP Platform.", Publisher="Altium Limited"
PS24-5: "Header, 4-Pin", LatestRevisionDate=17-Jul-2002, LatestRevisionNote="Re-released for DXP Platform.", Publisher="Altium Limited"
QBD QEX QFL QHD QOA QOV QPA QPO QPV QSP: library part 2N3904, "NPN General Purpose Amplifier", ComponentLink1Description="Manufacturer Link", ComponentLink1URL=http://www.fairchildsemi.com/, ComponentLink2Description=Datasheet, ComponentLink2URL=http://www.fairchildsemi.com/ds/2N%2F2N3904.pdf, DatasheetVersion=1997, LatestRevisionDate=15-Jan-2003, LatestRevisionNote="PCB Footprint 'BCY-W3/D4.7' replaced", PackageDescription="TO, Flat Index; 3 In-Line, Axial Leads; Body Dia. 4.5mm; Leads 0.51 x 0.48 mm (max)", PackageReference=TO-92A, PackageVersion=Sep-1998, Published=8-Jun-2000, Publisher="Altium Limited"
R1 R2 R3 R4 R5 R6 R7 R8 R9 R15 R16 R17 R18 R19 R20 R21 R25 R26 R38 R57: library part Res2, "Resistor", LatestRevisionDate=17-Jul-2002, LatestRevisionNote="Re-released for DXP Platform.", PackageDescription="Axial Device, Thru-Hole; 2 Leads; 0.4 in Pin Spacing", PackageReference=AXIAL-0.4, Published=8-Jun-2000, Publisher="Altium Limited"
R10 R11 R13 R23 R27 R28 R29 R30 R31 R32 R33 R34 R35 R36 R37 R39 R40 R41 R42 R43 R44 R45 R46 R48 R49 R50 R51 R52 R53 R54 R58 R59 R60 R61 R62 R64 R66 R67 R69 R72 R74: library part Res1, "Resistor", LatestRevisionDate=17-Jul-2002, LatestRevisionNote="Re-released for DXP Platform.", PackageReference=AXIAL-0.3, Published=8-Jun-2000, Publisher="Altium Limited"
R12 R14 R22 R24: library part "Res Adj2", "Variable Resistor", LatestRevisionDate=17-Jul-2002, LatestRevisionNote="Re-released for DXP Platform.", PackageDescription="Axial Device, Thru-Hole; 2 Leads; 0.6 in Pin Spacing", PackageReference=AXIAL-0.6, Published=8-Jun-2000, Publisher="Altium Limited", Set Position=0.5
R47: "Resistor", LatestRevisionDate=17-Jul-2002, LatestRevisionNote="Re-released for DXP Platform.", PackageReference=AXIAL-0.3, Published=8-Jun-2000, Publisher="Altium Limited"
R55 R56 R63 R65 R68 R70: library part Res, "Semiconductor Resistor", LatestRevisionDate=17-Jul-2002, LatestRevisionNote="Re-released for DXP Platform.", PackageReference=AXIAL-0.5, Published=8-Jun-2000, Publisher="Altium Limited"
RJC: library part RJ45_dual_right, "RJ45_Dual-Right"
S1: "Switch", LatestRevisionDate=17-Jul-2002, LatestRevisionNote="Re-released for DXP Platform.", PackageReference=SPST-2, Published=24-Mar-1999, Publisher="Altium Limited"
U1: "800mA and 1A Low Dropout Positive Regulator 2.85V, 3.3V, 5V, and Adjustable", ComponentLink1Description="Manufacturer Link", ComponentLink1URL=http://www.ti.com/, ComponentLink2Description=Datasheet, ComponentLink2URL=http://www-s.ti.com/sc/ds/REG1117.pdf, DatasheetVersion=Sep-1997, LatestRevisionDate=17-Jul-2002, LatestRevisionNote="Re-released for DXP Platform.", PackageDescription="SOT-223/SC-73; 4 Leads; Body 6.7 x 7.3 mm, inc. leads (LxW max)", PackageReference=ZZ311, PackageVersion=revC, Published=8-Jun-2000, Publisher="Altium Limited"
U3: "Low-Power, Slew-Rate-Limited RS-485/RS-422 Transceiver", Code_IPC=SOIC127P600-8, Code_JEDEC=MS-012-AA, ComponentLink1Description="Manufacturer Link", ComponentLink1URL=http://www.maxim-ic.com/, ComponentLink2Description=Datasheet, ComponentLink2URL=http://pdfserv.maxim-ic.com/en/ds/MAX1487-MAX491.pdf, DatasheetVersion=Feb-1996, LatestRevisionDate=13-Apr-2006, LatestRevisionNote="IPC-7351 Footprint Added.", PackageDescription="8-Pin Small Outline Integrated Circuit 1.27 mm Pitch", PackageReference=NSO8, Published=16-Jan-2001, Publisher="Altium Limited"
x1: library part 20.0MHz_HC49_4HSMX_30_50_-40+85C_30pF, "Crystal or Oscillator", Manufacturer_Name=IQD, Manufacturer_Part_Number="20.0MHz HC49/4HSMX 30/50/-40+85°C/30pF", Datasheet Link=http://docs-emea.rs-online.com/webdocs/12fa/0900766b812fa555.pdf

## Free pads (board coordinates)
  round 216.54 hole 137.8: 2(159.17,178.39) 2(159.17,4447.09) 2(1240.87,3458.9) 2(1701.5,3461.85) 2(4657.2,2147.87) 2(4971.18,178.39) 2(5315.67,178.39) 2(5315.67,4447.09)

## Via types
v1: diameter 50, hole 28, Top Layer to Bottom Layer, 71 vias

## Nets (pads, with @x,y where several pads share a name; then routed paths per layer and width w, separated by ;. In a path a pad name is that pad's centre, name@x,y a point inside that pad or via, vN(x,y) a via of type N, cw(c..) or ccw(c..) an arc to the next point about the centre after c; other vN are vias at no path point)
5GND: Addr.5 Addr.6 Addr.7 Addr.8 C1.2 C2.2 C3.2 C4.2 C5.2 C6.2 C7.2 C9.2 C10.1 C11.2 C12.1 c14.2 c15.2 C16.2 C17.2 C18.1 C19.1 C20.1 C21.1 C22.1 C23.1 C24.1 C25.1 C26.2 C27.1 C28.1 C29.1 C30.1 CAN.2 D13.2 D17.1 D18.1 D19.1 D20.1 D21.1 D22.1 D23.1 D24.1 D25.1 D26.1 D27.1 D28.3 D29.1 D30.1 DHT2.1 DHT.1 DPT.1 DVT.1 HT1.2 HT2.2 IC_V1.2 IC_V1.4 IC_V1.6 IC_V1.7 IC_V1.8 IC_V1.10 IC_V2.2 IC_V2.4 IC_V2.6 IC_V2.7 IC_V2.8 IC_V2.10 IC_V3.2 IC_V3.4 IC_V3.6 IC_V3.7 IC_V3.8 IC_V3.10 L1.1 LEDB1.1 LEDG1.1 LEDR1.1 LEDY1.1 PrOA.11 Prog1.2 PS24-5.1 PT1.2 R15.1 R20.1 R25.1 R38.1 R47.2 R54.2 R60.2 R63.1 R70.2 RJC.4 RJC.5 RJC.12 RJC.13 RJC.SH S1.2 U1.1 U2.10 U2.20 U2.27 U2.74 U2.99 U3.5 VT1.2 | length 40827.2
  Top Layer w10: D28.3@2431.81,3882.13 2488.9,3882.13 2606.02,3999.25 2741.65,3999.25 RJC.13@2802.68,3938.23 2810.27,3930.64 2810.27,3880.64 RJC.12@2852.68,3838.23 2907.01,3783.9 RJC.SH@3082.2,3783.9 ; IC_V1.2@2563.39,1926.18 2642.72,1926.18 2660.43,1943.9 2660.43,2021.65 ; IC_V1.4@2563.39,2026.18 2655.91,2026.18 2660.43,2021.65 ; IC_V1.8@2563.39,2226.18 IC_V1.6@2563.39,2126.18 2633.66,2126.18 2660.43,2099.41 2660.43,2021.65 ; IC_V3.10@2813.98,406.1 2813.98,345.47 2824.8,334.65 2964.8,334.65 3113.19,186.26 3937.72,186.26 4024.53,273.07 PT1.2@4024.53,299.45 ; IC_V3.6@2863.98,778.94 IC_V3.8@2763.98,778.94 ; IC_V3.4@2963.98,778.94 2963.98,692.52 2967.52,688.98 ; v1(3036.14,2991.38) 2860.55,2991.38 2831.22,3020.71 2964.68,3154.17 Prog1.2@2964.68,3257.13 3069.02,3152.8 3161.14,3152.8 3374.92,2939.02 D17.1@3374.92,2789.88 D19.1@3374.92,2664.88 D30.1@3374.92,2539.88 D18.1@3374.92,2414.88 D22.1@3374.92,2289.88 D21.1@3374.92,2164.88 D24.1@3374.92,2039.88 D20.1@3374.92,1914.88 ; 3063.7,1177.18 3115.07,1228.54 D29.1@3115.07,1233.54 ; IC_V3.2@3063.98,778.94 3063.98,689.96 3062.99,688.98 ; RJC.SH@3105.63,3783.9 3105.63,3910.28 3201.5,4006.14 3290.67,4006.14 RJC.5@3358.58,3938.23 3408.58,3888.23 RJC.4@3408.58,3838.23 ; C6.2@3402.99,1064.21 3407.99,1064.21 3427.99,1084.21 3427.99,1089.21 3732.99,1394.21 3732.99,1777.8 3834.37,1879.17 4618.66,1879.17 v1@4732.83,1993.35 ; C28.1@3454.17,279.76 3454.17,448.35 3213.54,688.98 3062.99,688.98 ; PrOA.11@4134.37,1737.64 4341.26,1530.75 DPT.1@4341.26,1494.33 ; v1(4205.43,2435.28) 4205.43,2430.35 4264.49,2371.3 S1.2@4278.27,2371.3 ; v1@4734.96,1994.33 v1(4734.96,1993.35) v1@4732.83,1993.35 ; 4860.87,2121.18 4860.87,2121.38 ; C9.2@4940.67,2036.38 4940.67,2041.38 4974.13,2074.84 LEDG1.1@4974.13,2224.65 4964.13,2224.65 4860.87,2121.38 ; L1.1@4993.43,3350.04 L1.1@4993.43,3367.76 ; R38.1@5037.83,1731.54 5037.83,1223.94 5096.93,1164.84 5151.46,1164.84 HT2.2@5159.17,1157.13 ; IC_V3.8@2763.98,778.94 2763.98,1036.61 2829.72,1102.36 v1(2829.72,1178.15) 2936.97,1178.15 2970.08,1211.26 2975.08,1211.26 2995.08,1231.26 D26.1@2995.08,1236.26 3354.8,1236.26 D23.1@3355.04,1236.5 3355.04,1241.5 3464.29,1350.75 3464.29,1727.6 3374.92,1816.97 D20.1@3374.92,1914.88 ; IC_V3.8@2763.98,778.94 2763.98,707.48 2782.48,688.98 2967.52,688.98 ; 2967.52,688.98 3062.99,688.98 ; D20.1@3374.92,1914.88 3554.13,1914.88 v1(3615.87,1976.61) 3831.18,2191.93 3918.31,2191.93 3978.15,2132.09 3978.15,2111.38 3984.96,2104.57 DHT.1@3990.87,2104.57 4001.69,2115.39 4480.04,2115.39 4602.09,1993.35 v1@4732.83,1993.35 ; v1@4732.83,1993.35 4860.87,2121.38
  Top Layer w20: IC_V2.10@2190.55,1432.09 v1(2470.47,1432.09) ; IC_V1.10@2190.55,2176.18 2194.33,2179.96 2227.09,2179.96 2227.24,2180.12 v1(2274.61,2180.12) 2428.54,2026.18 IC_V1.4@2563.39,2026.18 ; v1(2220.2,3830.94) 2271.38,3882.13 D28.3@2431.81,3882.13 ; v1(2222.17,3492.36) 2223.29,3491.24 2717.81,3491.24 v1(2718.94,3490.12) ; IC_V2.6@2563.39,1382.09 IC_V2.7@2563.39,1432.09 ; IC_V2.8@2563.39,1482.09 IC_V2.7@2563.39,1432.09 ; 2610.63,1282.09 2477.76,1282.09 2470.47,1289.37 ; v1(2829.72,1178.15) 2827.76,1180.12 2612.6,1180.12 2610.63,1182.09 2488.19,1182.09 2470.47,1199.8 2470.47,1289.37 ; RJC.SH@3082.2,3783.9 RJC.SH@3105.63,3783.9 ; C6.2@3402.99,1064.21 R25.1@3402.99,952.99 4024.53,952.99 ; PT1.2@4024.53,299.45 HT1.2@4024.53,838.82 4024.53,952.99 ; PrOA.11@4134.37,1737.64 4134.37,1488.03 VT1.2@4024.53,1378.19 4024.53,952.99 ; LEDR1.1@4139.49,3627.32 LEDB1.1@4311.73,3627.32 LEDY1.1@4483.98,3627.32 4494.92,3627.32 4520.39,3652.8 4759.17,3652.8 C10.1@4819.21,3592.76 ; S1.2@4278.27,2371.3 S1.2@4482.99,2371.3 4677.87,2371.3 4783.19,2476.61 v1(4783.19,2579.96) ; v1(4874.72,2801.42) 4874.72,2671.5 v1(4783.19,2579.96) ; L1.1@4982.99,3357.32 4982.99,3428.98 C10.1@4819.21,3592.76 ; L1.1@5000.71,3357.32 4993.43,3350.04 4830.63,3187.24 C26.2@4772.36,3187.24 4772.36,3130.16 v1(4665.08,3022.87) ; 2470.47,1289.37 v1(2470.47,1432.09) ; v1(2470.47,1432.09) IC_V2.7@2563.39,1432.09 ; v1(4665.08,3022.87) 4665.08,2698.07 v1(4783.19,2579.96) ; v1(4665.08,3022.87) 4519.41,3168.54 Addr.5@4519.41,3204.57 Addr.6@4519.41,3254.57 Addr.7@4519.41,3304.57 Addr.8@4519.41,3354.57 4519.41,3408.7 4624.72,3514.02 4740.47,3514.02 C10.1@4819.21,3592.76
  Top Layer w30: Prog1.2@2964.68,3257.13 2964.68,3357.4 3045.28,3437.99 3910.58,3437.99 3928.15,3455.57 3928.15,3581.69 3973.78,3627.32 4127.8,3627.32 v1(4133.58,3633.11) ; PS24-5.1@4983.98,4217.76 5085.55,4116.18 5085.55,3459.88 L1.1@4993.43,3367.76
  Bottom Layer w10: C29.1@2395.39,1374.96 2395.39,1379.96 2439.87,1424.43 2462.82,1424.43 v1(2470.47,1432.09) ; v1(2829.72,1178.15) 2829.72,1579.25 3332.4,2081.93 3332.4,2198.27 3324.72,2205.94 C16.2@3329.72,2205.94 ; v1(3036.14,2991.38) 3045.79,3001.02 3118.82,3001.02 C17.2@3118.82,2996.02 ; C17.2@3125.71,2991.69 C21.1@3223.15,2894.25 ; C21.1@3223.15,2895.2 C21.1@3223.15,2894.25 ; U2.74@3345.2,2874.25 3243.15,2874.25 C21.1@3223.15,2894.25 ; DHT2.1@3599.13,1812.24 3619.8,1812.24 3720.2,1711.85 v1(3732.01,1711.85) ; v1(3615.87,1976.61) 3661.14,2021.89 R47.2@3661.14,2137.32 3759.76,2137.32 3874.65,2252.2 C22.1@3878.98,2252.2 ; C20.1@3856.3,3077.01 3858.98,3074.33 U2.99@3858.98,2954.96 3858.98,2728.86 3871.06,2716.77 U2.10@3939.68,2716.77 3983.98,2716.77 4072.28,2805.08 4072.28,2828.7 C19.1@4091.26,2828.7 4093.23,2828.7 4187.72,2923.19 C12.1@4183.5,2927.4 ; U2.27@3858.98,2360.47 3858.98,2272.2 C22.1@3878.98,2252.2 ; C22.1@3879.65,2252.2 C22.1@3878.98,2252.2 ; U2.20@3939.68,2519.92 4083.39,2519.92 4084.37,2518.94 C18.1@4084.37,2483.78 ; C18.1@4091.26,2504.45 4136.26,2504.45 v1(4205.43,2435.28) ; C27.1@4100.12,1831.5 4100.12,1771.89 PrOA.11@4134.37,1737.64 ; c15.2@4661.14,2568.86 c14.2@4661.14,2752.48 ; DVT.1@4681.81,1950.04 4687.72,1950.04 4731.02,1993.35 v1(4734.96,1993.35) ; C7.2@5292.36,1157.13 C7.2@5297.95,1151.54
  Bottom Layer w20: v1(2222.17,3492.36) v1@2220.2,3490.39 ; v1(2274.61,2180.12) 2274.61,2270.35 ; C30.1@2395.39,2256.85 2381.89,2270.35 2274.61,2270.35 ; C24.1@2575.51,3024.84 2410.94,3024.84 2345,3090.79 2345,3151.02 2220.2,3275.83 v1@2220.2,3490.39 ; v1(2718.94,3490.12) R60.2@2718.94,3604.57 2720.2,3604.57 2803.58,3687.95 R70.2@2913.11,3687.95 ; C23.1@2963.03,3395.91 2964.68,3394.25 Prog1.2@2964.68,3257.13 ; RJC.SH@3105.63,3783.9 RJC.SH@3111.73,3777.8 ; R15.1@3770.12,240.39 C2.2@3770.12,134.09 3887.52,134.09 4024.53,271.1 4024.53,437.17 C1.2@4029.53,442.17 ; R20.1@3771.81,1280.75 R20.1@3775.04,1280.75 ; C3.2@3775.04,1180.35 R20.1@3775.04,1280.75 ; C20.1@3856.3,3077.01 3869.8,3090.51 R54.2@3869.8,3166.57 ; R54.2@3888.23,3182.32 4216.26,3182.32 4313.7,3084.88 D13.2@4341.26,3084.88 ; HT1.2@4024.53,838.82 4024.53,990.31 C5.2@4024.61,990.39 ; C4.2@4030.51,1509.09 4030.51,1316.46 3994.8,1280.75 R20.1@3775.04,1280.75 ; v1(4133.58,3633.11) 4206.42,3633.11 4353.07,3779.76 4353.07,3884.88 4308.58,3929.37 4300.63,3921.42 4300.63,3926.42 C25.1@4287.13,3939.92 4275.98,3928.78 CAN.2@4171.46,3928.78 4107.6,3928.78 4053.86,3982.52 4053.86,4057.68 3956.42,4155.12 R63.1@3956.42,4160.12 3956.42,4165.12 3739.21,4382.32 RJC.SH@3713.9,4382.32 RJC.SH@2497.36,4382.32 2220.2,4105.16 v1(2220.2,3830.94) v1@2220.2,3490.39 ; PrOA.11@4134.37,1737.64 PrOA.11@4135.45,1738.72 ; v1@4654.25,3022.87 4655.24,3022.87 v1(4665.08,3022.87) ; c15.2@4661.14,2568.86 4672.24,2579.96 v1(4783.19,2579.96) ; D27.1@4872.76,2803.39 v1(4874.72,2801.42) ; PS24-5.1@4992.24,4216.77 5085.55,4123.46 5085.55,3913.43 5297.95,3701.02 C7.2@5297.95,1151.54 ; HT2.2@5159.17,1157.13 C7.2@5292.36,1157.13 ; v1@2220.2,3490.39 2038.11,3308.31 2038.11,2597.09 2274.61,2360.59 2274.61,2270.35
  Bottom Layer w40: D13.2@4344.21,3107.2 4654.92,3107.2 U1.1@4655.24,3107.52 4655.24,3022.87 4655.24,3009.69 4863.62,2801.3 D27.1@4863.62,2796.3
24GND: C8.1 D12.2 L1.2 M_pmp1.3 M_pmp2.3 PS24-5.3 QBD.1 QEX.1 QFL.1 QHD.1 QOA.1 QOV.1 QPA.1 QPO.1 QPV.1 QSP.1 | length 11452.8
  Top Layer w20: QPA.1@1174.92,2096.06 1193.62,2077.36 QPA.1@1193.62,2076.81 ; M_pmp1.3@1447.56,2545.51 M_pmp1.3@1447.56,2609.49 ; M_pmp2.3@2028.27,2540.59 M_pmp2.3@2028.27,2604.57
  Top Layer w40: QPA.1@1174.92,2096.06 1174.92,2643.94 1208.39,2677.4 1379.65,2677.4 1447.56,2609.49 1509.57,2671.5 1961.34,2671.5 M_pmp2.3@2028.27,2604.57
  Top Layer w50: M_pmp2.3@2028.27,2540.59 2101.1,2540.59 2508.09,2947.58 ; D12.2@2196.57,4281.73 2169.02,4281.73 2123.74,4236.46 2123.74,3331.93 2508.09,2947.58 ; C8.1@4101.1,4350.24 4464.69,4350.24 4982.99,3831.93 L1.2@4982.99,3769.13 4974.92,3761.06 3880.63,3761.06 3646.38,3526.81 2878.66,3526.81 2666.06,3314.21 2666.06,3105.55 2508.09,2947.58
  Bottom Layer w40: QBD.1@588.31,948.66 601.5,961.85 QSP.1@1092.83,961.85 ; QSP.1@1092.83,946.89 QSP.1@1092.83,961.85 ; 1092.83,1830.55 1092.83,1436.26 ; QPO.1@1193.62,1196.69 1189.29,1201.02 1092.83,1201.02 ; QPV.1@1193.62,1830.55 QPV.1@1210.75,1847.68 ; QPA.1@1193.62,2076.81 1092.83,1976.02 1092.83,1839.8 1100.71,1847.68 QPV.1@1210.75,1847.68 ; QOV.1@1405.24,1545.51 1302.14,1545.51 1192.89,1436.26 1092.83,1436.26 ; QHD.1@1405.24,1780.55 1338.11,1847.68 QPV.1@1210.75,1847.68 ; QEX.1@2101.89,944.92 2084.96,961.85 QSP.1@1092.83,961.85 ; QSP.1@1092.83,961.85 1092.83,1201.02 ; 1092.83,1201.02 1092.83,1436.26
+3.3: C13.1 C18.2 C19.2 C20.2 C21.2 C22.2 C23.2 C24.2 D14.1 DHT2.2 DHT.2 DPT.2 DVT.2 FU1.2 R12.2 R14.2 R22.2 R24.2 R46.1 R51.2 R55.2 R56.2 R58.1 U2.11 U2.19 U2.21 U2.22 U2.28 U2.50 U2.75 U2.100 U3.8 | length 13888.6
  Top Layer w10: v1@2933.78,3036.65 2944.61,3036.65 2997.76,3089.8 v1(3082.4,3089.8) 3082.4,2945.12 2946.57,2809.29 v1(2946.57,1847.68) 3102.09,1692.17 v1(3396.38,1692.17) ; v1@3938.7,3071.1 v1(3949.04,3081.44) 4177.87,2852.6 C13.1@4177.87,2744.06 ; DHT.2@3990.87,2179.37 3990.87,2228.59 v1@3993.06,2230.77 ; v1@3993.06,2228.8 v1@3993.06,2230.77 ; v1@4006.61,2247.04 v1@4002.92,2243.35 ; DPT.2@4415.08,1495.31 4509.57,1495.31 v1(4730.04,1715.79) ; v1@3993.06,2230.77 4002.92,2240.64 v1@4002.92,2243.35 ; v1@3993.06,2230.77 3993.06,2233.48 v1@4002.92,2243.35
  Top Layer w20: v1(2442.64,3347.68) v1(2575.51,3214.8) ; v1(2646.38,2967.76) 2727.09,3048.46 2727.09,3255.16 2849.13,3377.2 v1(2863.9,3377.2) ; v1(3761.54,2243.35) 4002.92,2243.35 4006.61,2243.35 4006.61,2247.04 4014.57,2254.99 4014.57,2264.09 4057.8,2307.32 4760.55,2307.32 4984.96,2531.73 v1(4984.96,2715.79) ; C13.1@4177.87,2744.06 R51.2@4276.3,2744.06
  Bottom Layer w10: D14.1@2760.55,3123.27 2776.3,3123.27 2867.83,3031.73 v1(2938.7,3031.73) ; v1(2946.57,1847.68) 3053.86,1847.68 3165.08,1958.9 3165.08,2160.67 3271.38,2266.97 3341.26,2266.97 3406.22,2331.93 U2.50@3406.22,2360.47 ; v1(3082.4,3089.8) 3127.48,3089.8 3223.15,2994.13 C21.2@3223.15,2989.13 ; R56.2@3164.09,3491.1 3306.3,3491.1 3431.02,3366.38 R12.2@3436.02,3366.38 ; C21.2@3223.15,2985.2 3223.15,2980.2 3309.41,2893.94 U2.75@3345.2,2893.94 ; v1(3396.38,1692.17) 3694.61,1990.39 3694.61,2040.59 3825.51,2171.5 3922.95,2171.5 v1(4000.71,2249.25) ; R24.2@3436.02,3072.09 R22.2@3436.02,3170.18 R12.2@3436.02,3366.38 ; R12.2@3441.02,3366.38 R12.2@3436.02,3366.38 ; C22.2@3789.65,2252.2 3794.65,2252.2 3839.29,2296.85 U2.28@3839.29,2360.47 ; U2.100@3878.66,2954.96 3878.66,3014.37 3941.3,3077.01 C20.2@3946.3,3077.01 4197.56,3077.01 4253.66,3020.91 4253.66,2989.41 ; U2.21@3939.68,2500.24 U2.22@3939.68,2480.55 3885.55,2480.55 3875.71,2490.39 3875.71,2526.81 3888.5,2539.61 U2.19@3939.68,2539.61 4035.16,2539.61 4074.53,2578.98 C18.2@4083.39,2578.98 ; U2.11@3939.68,2697.09 4054.65,2697.09 4091.26,2733.7 C19.2@4091.26,2738.7 4091.26,2743.7 4253.66,2906.1 4253.66,2989.41 ; C18.2@4091.26,2594.45 4103.35,2594.45 4359.96,2337.83 4789.09,2337.83 4812.22,2360.96 ; DVT.2@4681.81,1875.24 4681.81,1765.98 4680.83,1765 v1(4730.04,1715.79) 4841.26,1827.01 4841.26,2331.93 4812.22,2360.96 ; v1(4984.96,2715.79) v1@4982.99,2715.79 ; 4253.66,2989.41 4602.09,2989.41 4748.06,2843.43 4748.06,2784.38 4816.65,2715.79 v1@4982.99,2715.79 ; 4812.22,2360.96 4982.99,2531.73 v1@4982.99,2715.79
  Bottom Layer w20: v1(2442.64,3347.68) 2442.64,3414.33 R58.1@2446.85,3418.54 ; U3.8@2495,3122.28 2568.07,3122.28 C24.2@2575.51,3114.84 ; v1(2575.51,3214.8) C24.2@2575.51,3114.84 ; C24.2@2578.03,3117.36 C24.2@2575.51,3114.84 ; v1(2646.38,2967.76) 2646.38,3038.98 2575.51,3109.84 C24.2@2575.51,3114.84 ; D14.1@2760.55,3117.36 D14.1@2760.55,3123.27 2760.55,3288.43 2868.03,3395.91 C23.2@2873.03,3395.91 2862.91,3406.02 2947.99,3491.1 R55.2@3066.65,3491.1 R56.2@3164.09,3491.1 ; v1(2863.9,3377.2) C23.2@2868.82,3372.28 ; v1(3761.54,2243.35) C22.2@3763.5,2245.31 ; FU1.2@4982.99,2847.11 4984.96,2845.14 v1(4984.96,2715.79)